# Altium PCB Power Center.PcbDoc
Units mil, origin at the board's own origin, x right, y up, seen from the top; angles counter-clockwise.
Board outline 1575 x 1575 mil, 4 copper layers (Top Layer, GND, POWER, Bottom Layer), stack 30.635 mil thick; 18 components, 4 nets, 46 pads, 6 vias.
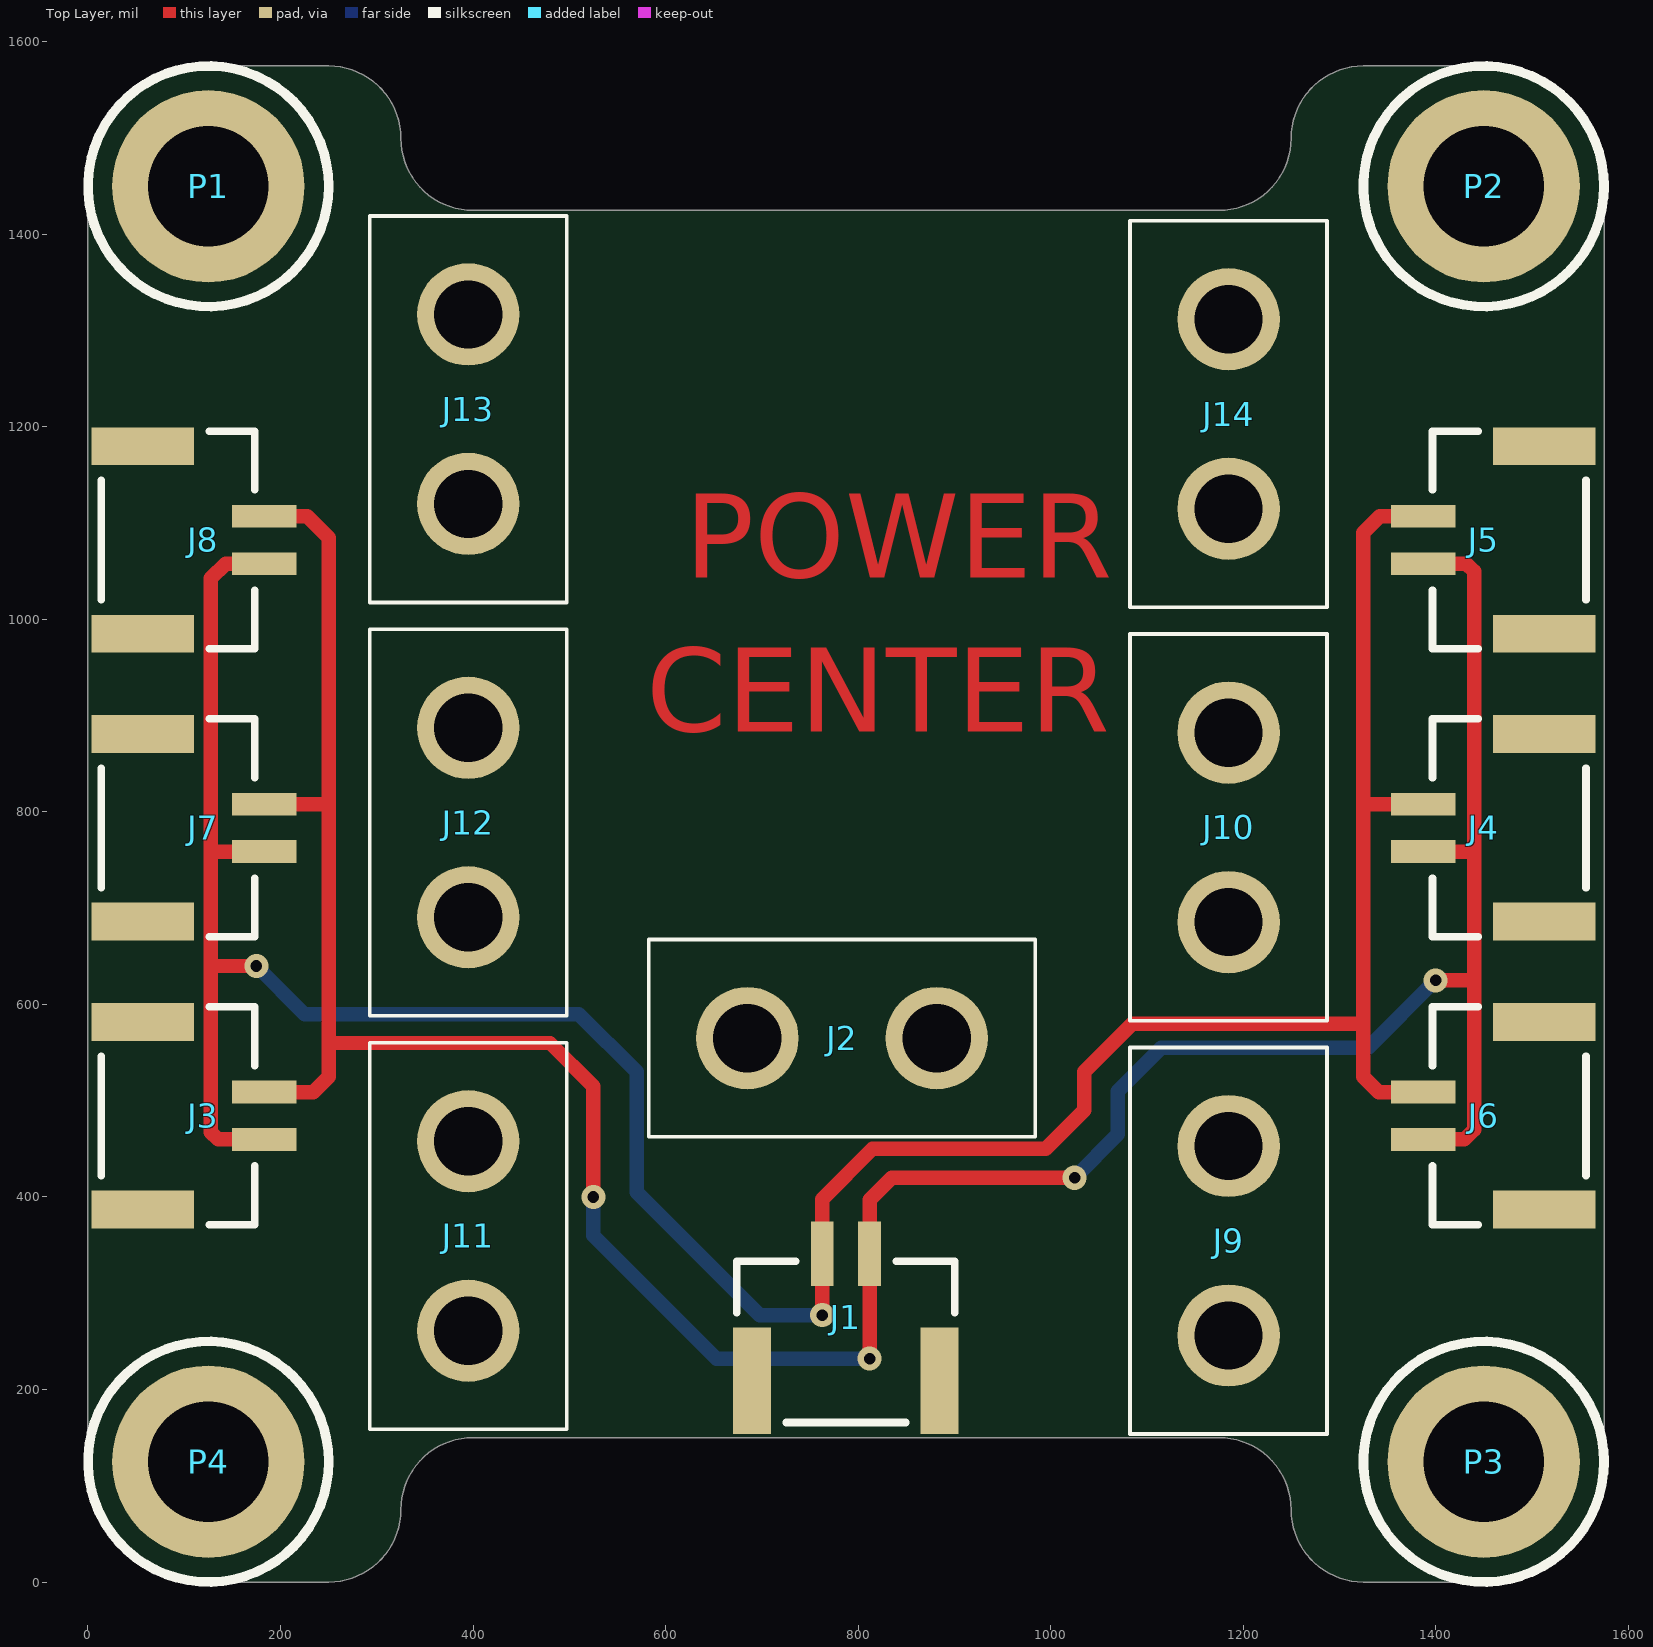
[diagram p0: Top Layer view]
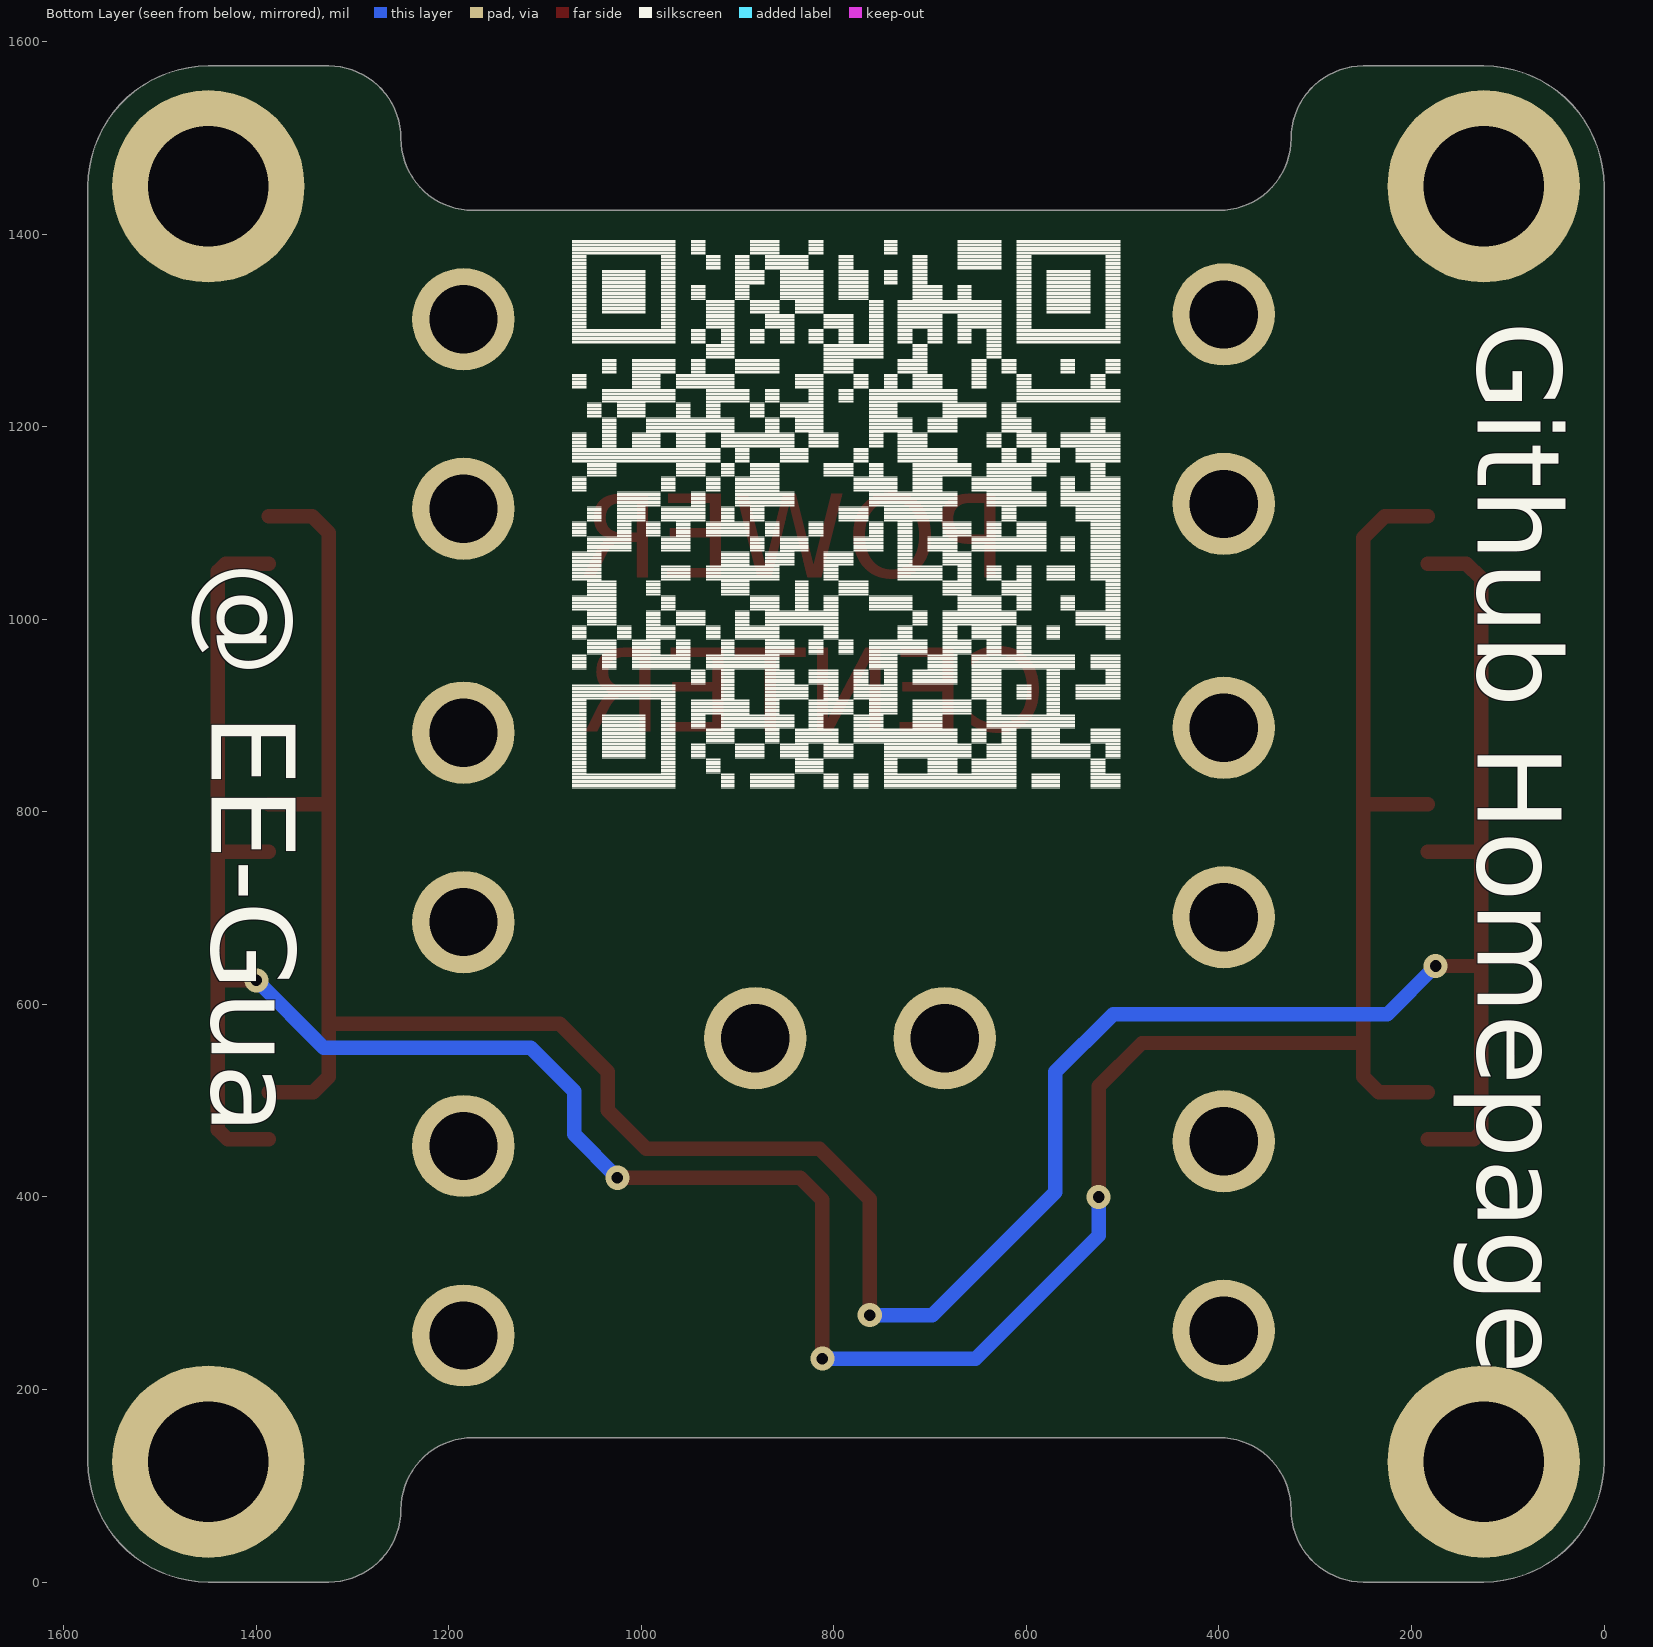
[diagram p1: Bottom Layer view, seen from below]
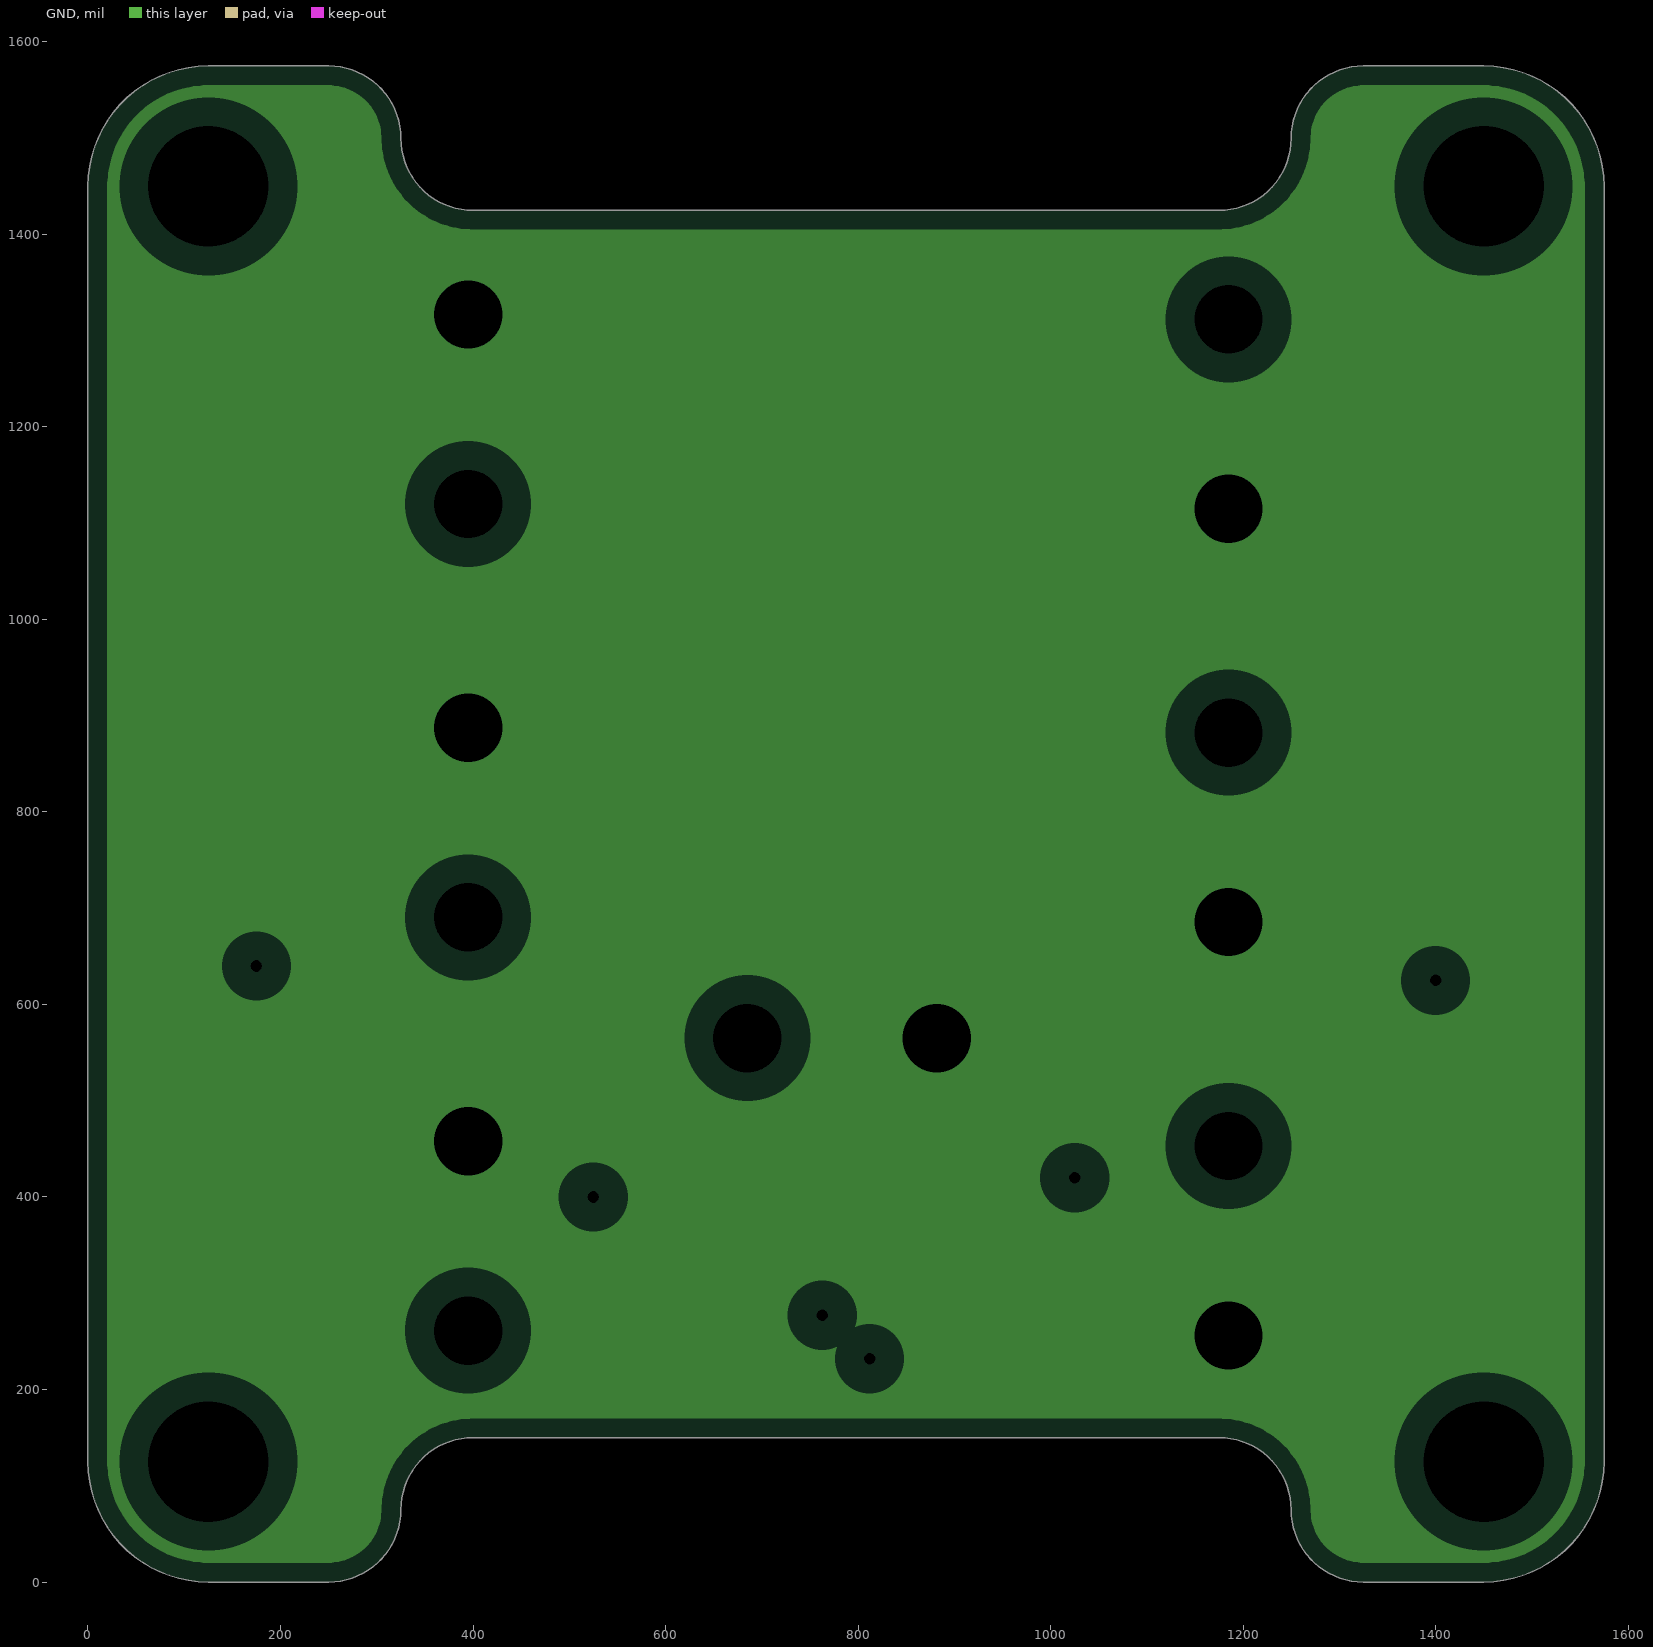
[diagram p2: GND, clearances drawn from the general rule]
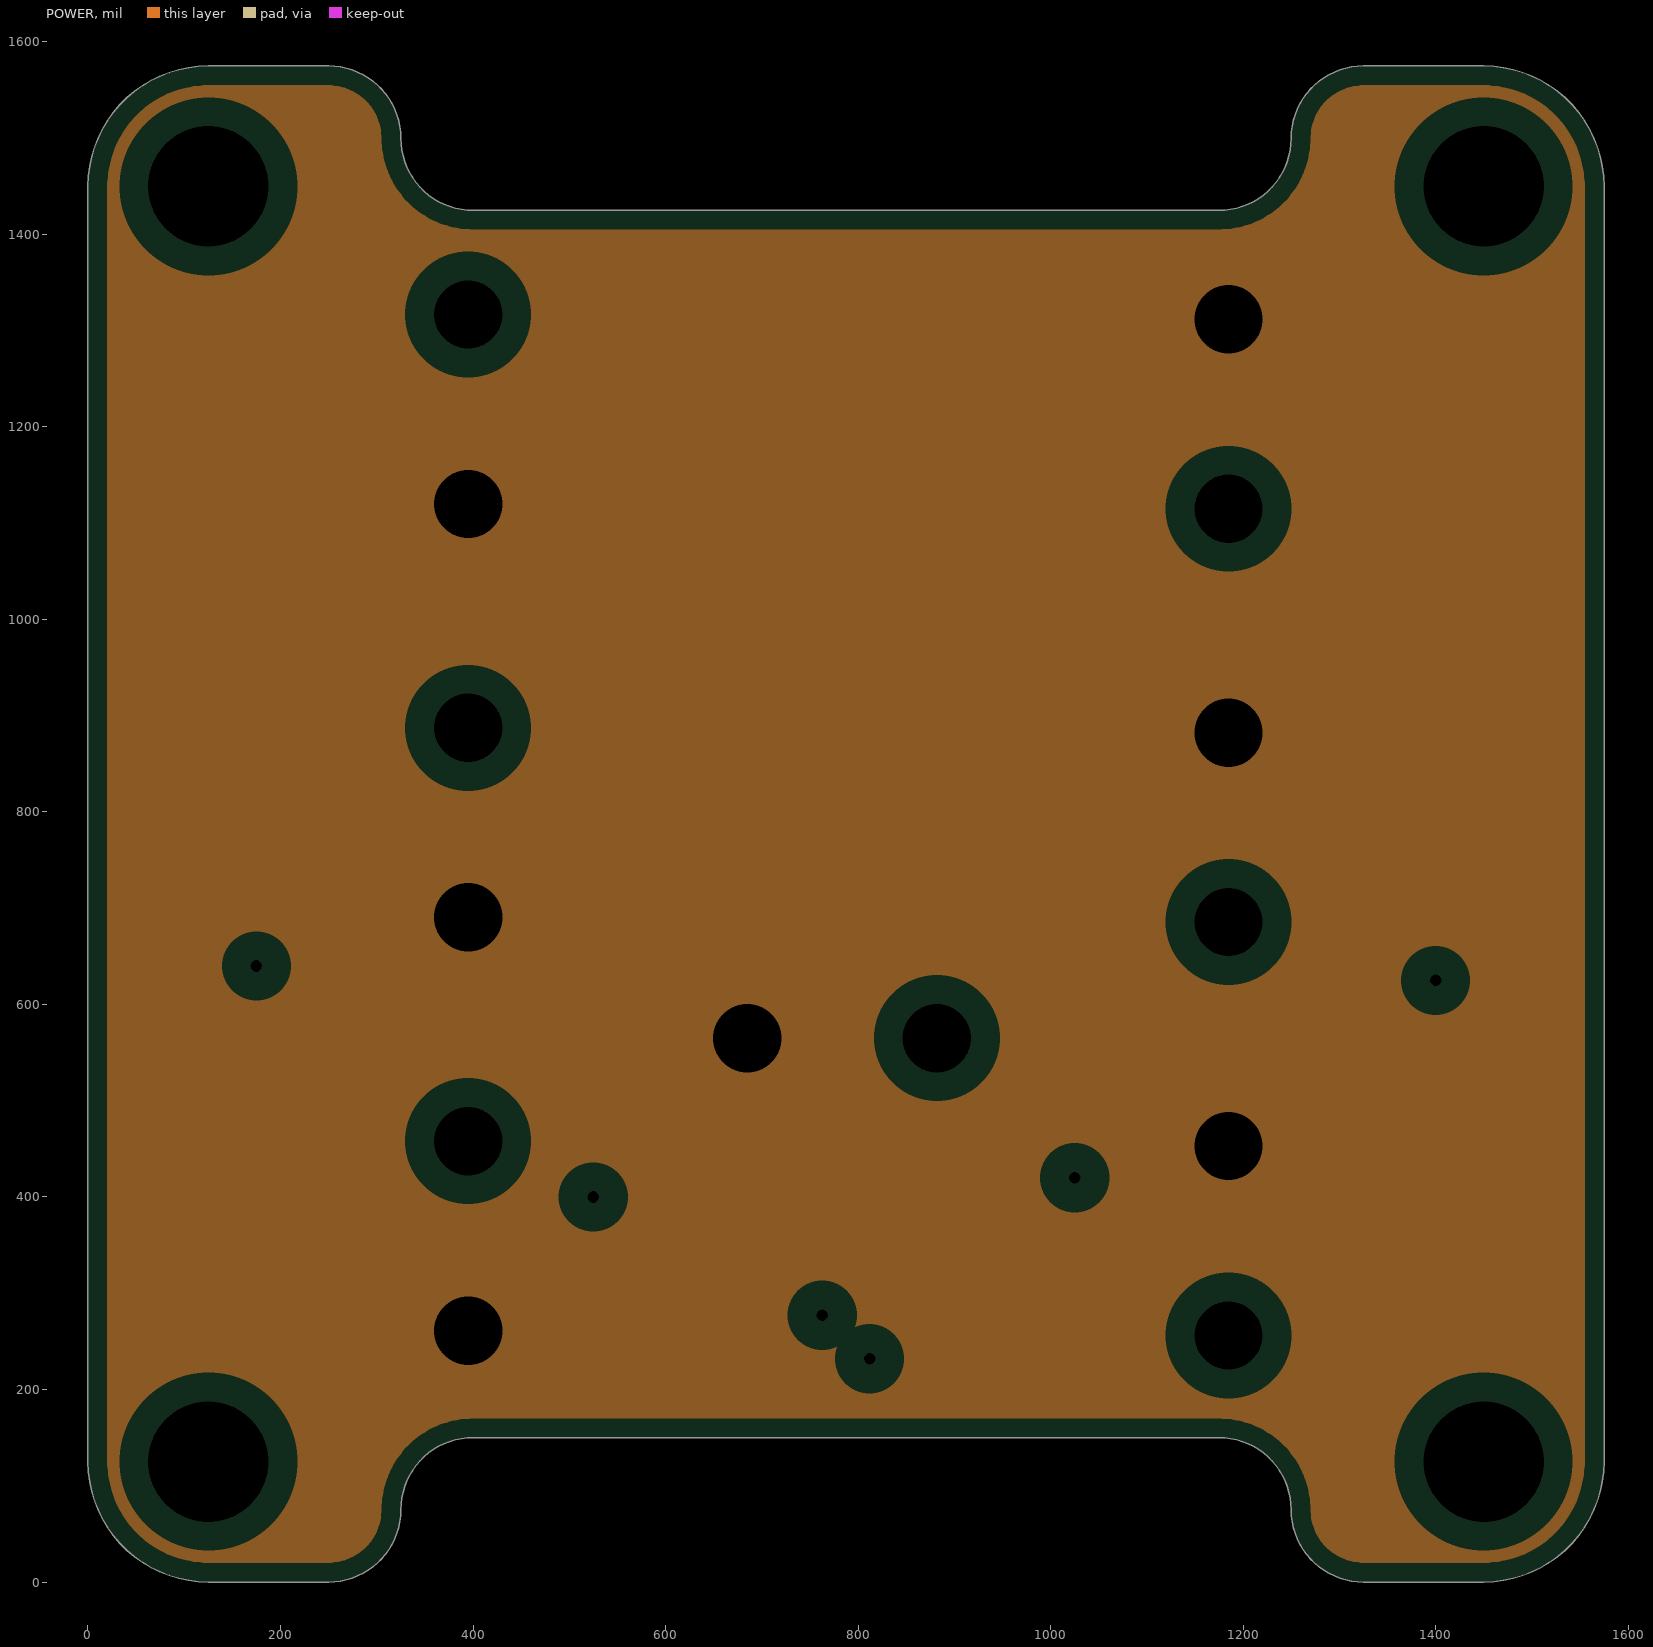
[diagram p3: POWER, clearances drawn from the general rule]
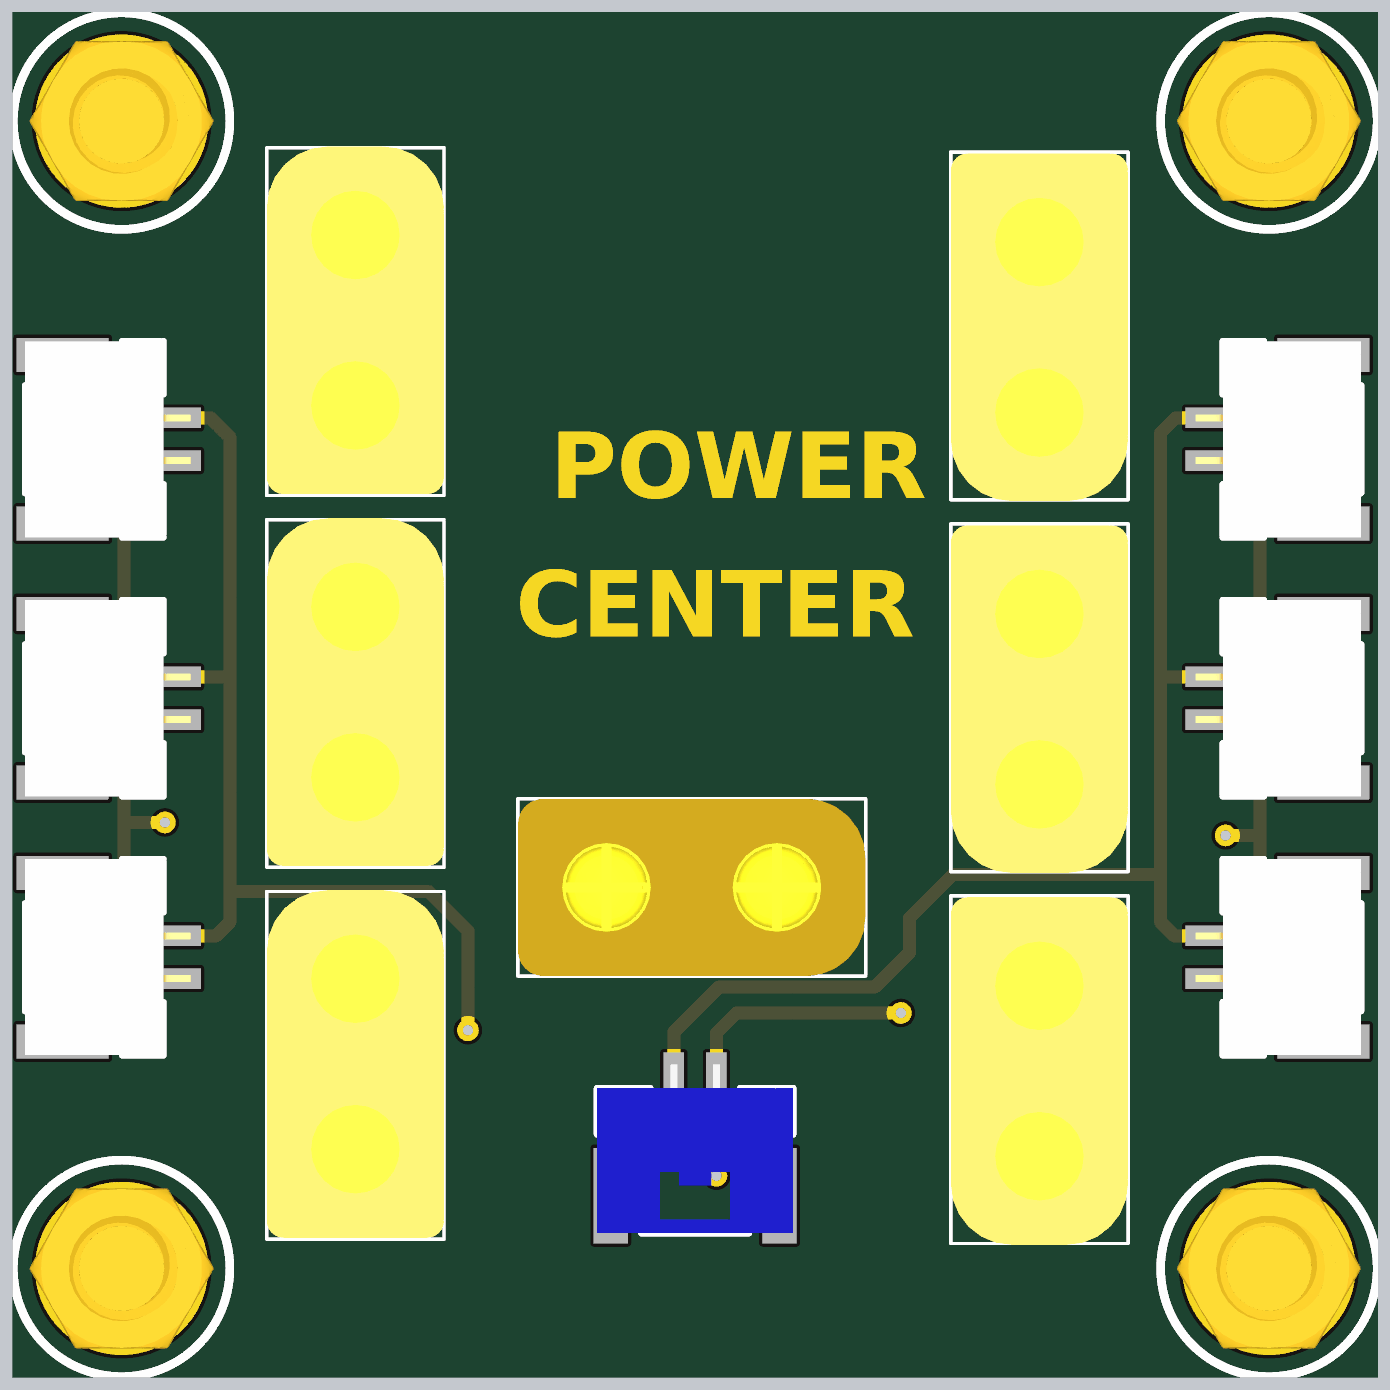
[diagram p4: 3D render of the assembled board from above, using the file's embedded part models]

## Layer stack, top to bottom
Top Solder: solder mask 0.4, Solder Resist, Dk 3.5
Top Layer: signal copper 1.4
Dielectric 1: core 10, FR-4, Dk 4.2
GND: plane copper 1.4173, net GND
Dielectric 3: prepreg 5, Dk 4.2
POWER: plane copper 1.4173, net VCC
Dielectric 2: core 10, Dk 4.2
Bottom Layer: signal copper 1.4
Bottom Solder: solder mask 0.4, Solder Resist, Dk 3.5

## Board outline
125,0 cw(c125,125) 0,125 0,1450 cw(c125,1450) 125,1575 250,1575 cw(c250,1500) 325,1500 ccw(c400,1500) 400,1425 1175,1425 ccw(c1175,1500) 1250,1500 cw(c1325,1500) 1325,1575 1450,1575 cw(c1450,1450) 1575,1450 1575,125 cw(c1450,125) 1450,0 1325,0 cw(c1325,75) 1250,75 ccw(c1175,75) 1175,150 400,150 ccw(c400,75) 325,75 cw(c250,75) 250,0

## Design rules (kind name [scope] priority, off if disabled: settings)
Clearance [All] p1: gap=10 ignorepadtopadclearanceinfootprint=FALSE
PlaneClearance [All] p1: clearance=30
PlaneConnect [All] p1: planeconnectstyle=Direct reliefexpansion=20 reliefentries=4 reliefconductorwidth=10 reliefairgap=10
PolygonConnect [All] p1: connectstyle=Direct reliefconductorwidth=10 reliefentries=4 polygonreliefangle="90 Angle" airgapwidth=10
RoutingVias [All] p1: holewidth=28 width=50 viastyle="Through Hole" minholewidth=28 minwidth=50 maxholewidth=28 maxwidth=50
SolderMaskExpansion [All] p1: expansion=4
UnRoutedNet [All] p1: checkbadconnections=TRUE
Width [All] p1: maxlimit=50 minlimit=10 preferedwidth=10 minimp=50.000000 maximp=50.000000 favimp=50.000000
27 further rules are at their usual default settings.

## Components (designator, comment, footprint, x,y, rotation, side; value= is the part's Value field where it differs from the comment)
J1 "GH1.25 Connector 2P立" GH1.25立2P 787.4,275 r180 top
J2 "XT30-M" XT30-M 685,565 r90 top
J3 "GH1.25 Connector 2P卧" GH1.25卧2P 120,484.37 r270 top
J4 "GH1.25 Connector 2P卧" GH1.25卧2P 1450,783.46 r90 top
J5 "GH1.25 Connector 2P卧" GH1.25卧2P 1450,1082.56 r90 top
J6 "GH1.25 Connector 2P卧" GH1.25卧2P 1450,484.37 r90 top
J7 "GH1.25 Connector 2P卧" GH1.25卧2P 120,783.46 r270 top
J8 "GH1.25 Connector 2P卧" GH1.25卧2P 120,1082.56 r270 top
J9 "XT30-F" XT30-F 1185,452.95 r0 top
J10 "XT30-F" XT30-F 1185,882.4 r0 top
J11 "XT30-F" XT30-F 395,261.1 r180 top
J12 "XT30-F" XT30-F 395,690.55 r180 top
J13 "XT30-F" XT30-F 395,1120 r180 top
J14 "XT30-F" XT30-F 1185,1311.85 r0 top
P1 "M3铜柱" M3x4+6铜柱 125,1450 r0 top
P2 "M3铜柱" M3x4+6铜柱 1450,1450 r0 top
P3 "M3铜柱" M3x4+6铜柱 1450,125 r0 top
P4 "M3铜柱" M3x4+6铜柱 125,125 r0 top

## Footprints (in the part's own frame and the unit in brackets; to place one, negate y for a bottom-side part, rotate by r counter-clockwise, add the part's x,y. Pads: shape width x height; smd on the part's side, far side on the other; paste and mask are expansions set on the pad)
GH1.25卧2P [mm] "SMD, 2-Leads, Body 5.75x4.05mm, Pitch 1.25mm"
  rect 0.6x1.7 smd: 1(-0.625,1.6) 2(0.625,1.6)
  rect 1x2.7 smd: MP1(-2.475,-1.6) MP2(2.475,-1.6)
  silkscreen extent -2.88,-2.7 2.88,1.35, body extent -2.87,-2.7 2.88,2.15, height 4.35
GH1.25立2P [mm] "Connector, 2-Leads, Body 5.75x4.25mm, Pitch 1.25mm"
  rect 0.6x1.7 smd: 1(-0.625,-1.675) 2(0.625,-1.675)
  rect 1x2.8 smd: MP1(-2.475,1.675) MP2(2.475,1.675)
  silkscreen extent -2.88,-1.47 2.88,2.78, body extent -2.88,-2.17 2.87,2.78, height 4.21
M3x4+6铜柱 [mil]
  round 200 hole 125: 1(0,0)
  silkscreen extent -125,-125 125,125, body extent -106,-93 106,93, height 159
XT30-F [mm]
  round 2.7 hole 1.8: 1(0,0) 2(0,-5)
  silkscreen extent -2.6,-7.6 2.6,2.6, body extent -2.6,-7.64 2.6,2.56, height 9.4
XT30-M [mm]
  round 2.7 hole 1.8: 1(0,0) 2(0,-5)
  silkscreen extent -2.6,-7.6 2.6,2.6, body extent -2.6,-7.6 2.6,2.6, height 10.66

## Part data
J1: "GH1.25 Connector", Manufacturer=JST, Package Description="GH Disconnectable Crimp Style Connector, Pitch 1.25 mm, 1 x 2 Position, Height 4.05 mm", Package Reference=BM02B-GHS-TBT, Datasheet URL=http://www.jst-mfg.com/product/pdf/eng/eGH.pdf, Datasheet Version=05/2016, Manufacturer URL=http://www.jst.com/home2.html, Mounting Technology=SurfaceMount, No of Positions=2, Pitch=1.25mm, Style/Orientation=StraightHeader/Plug, Termination=Crimp, Type=WiretoBoard
J2: "Connector", Manufacturer_Name=Amass, Manufacturer_Part_Number=XT30PB, Datasheet Link=https://www.tme.eu/Document/4acc913878197f8c2e30d4b8cdc47230/XT30UPB%20SPEC.pdf, Height=10.7mm
J3 J4 J5 J6 J7 J8: "GH1.25 Connector", Manufacturer=JST, Package Description="GH Disconnectable Crimp Style Connector, Pitch 1.25 mm, 1 x 2 Position, Height 4.25 mm", Package Reference=SM02B-GHS-TB, Datasheet URL=http://www.jst-mfg.com/product/pdf/eng/eGH.pdf, Datasheet Version=05/2016, Manufacturer URL=http://www.jst.com/home2.html, Mounting Technology=SurfaceMount, No of Positions=2, Pitch=1.25mm, Style/Orientation=RightAngleHeader/Plug, Termination=Crimp, Type=WiretoBoard
J9 J10 J11 J12 J13 J14: "Connector"
P1 P2 P3 P4: "Hole M3X4+6"

## Via types
v1: diameter 25, hole 12, Top Layer to Bottom Layer, 6 vias

## Nets (pads, with @x,y where several pads share a name; then routed paths per layer and width w, separated by ;. In a path a pad name is that pad's centre, name@x,y a point inside that pad or via, vN(x,y) a via of type N, cw(c..) or ccw(c..) an arc to the next point about the centre after c; other vN are vias at no path point)
CAN_H: J1.2 J3.2 J4.2 J5.2 J6.2 J7.2 J8.2 | length 3155.9
  Top Layer w15: v1(175,640) 127.66,640 ; J3.2 135.24,459.76 127.66,467.34 127.66,640 ; J7.2 127.66,758.86 ; J8.2 142.95,1057.95 127.66,1042.66 127.66,758.86 ; v1(762.8,277.2) J1.2 762.8,397.8 815,450 995,450 1035,490 1035,530 1085,580 1325,580 ; J6.2 1341.02,508.98 1325,525 1325,580 ; J4.2 1325,808.07 ; J5.2 1342.17,1107.17 1325,1090 1325,808.07 ; 127.66,640 127.66,758.86 ; 1325,580 1325,808.07
  Bottom Layer w15: v1(175,640) 225,590 510,590 570,530 570,405 697.8,277.2 v1(762.8,277.2)
CAN_L: J1.1 J3.1 J4.1 J5.1 J6.1 J7.1 J8.1 | length 3225.8
  Top Layer w15: J3.1 233.98,508.98 250,525 250,560 ; J7.1 250,808.07 ; J8.1 227.83,1107.17 250,1085 250,808.07 ; v1(525,400) 525,515 480,560 250,560 ; v1(812.01,232.01) J1.1 812.01,397.01 835,420 v1(1025,420) ; J6.1 1429.76,459.76 1440,470 1440,625 ; J4.1 1440,758.86 ; J5.1 1432.05,1057.95 1440,1050 1440,758.86 ; v1(1400,625) 1440,625 ; 250,560 250,808.07 ; 1440,625 1440,758.86
  Bottom Layer w15: v1(525,400) 525,360 652.99,232.01 v1(812.01,232.01) ; v1(1025,420) 1070,465 1070,510 1115,555 1330,555 v1(1400,625)
GND: J2.2 J9.2 J10.2 J11.2 J12.2 J13.2 J14.2
VCC: J2.1 J9.1 J10.1 J11.1 J12.1 J13.1 J14.1
pads on no net: J1.MP1 J1.MP2 J3.MP1 J3.MP2 J4.MP1 J4.MP2 J5.MP1 J5.MP2 J6.MP1 J6.MP2 J7.MP1 J7.MP2 J8.MP1 J8.MP2 P1.1 P2.1 P3.1 P4.1

## Polygon pours and split planes (outlines as drawn)
GND on GND (split plane): 233 vertices, not listed, extent 20.03,20.03 1554.97,1554.97
VCC on POWER (split plane): 233 vertices, not listed, extent 20.03,20.03 1554.97,1554.97

## Other copper
Top Layer:
  text "POWER" at 620,1015 h150
  text "CENTER" at 580,855 h150

## Silkscreen, mask and mechanical layers (free items; w line width, h text height)
Bottom Overlay:
  drawing of 4443 lines, arcs and shapes, not listed
  text "Github Homepage" at 160,1310 h150 r90
  text "@ EE-Gua" at 1475,1060 h150 r90
Top Solder:
  text "POWER" at 620,1015 h150
  text "CENTER" at 580,855 h150
Mechanical 1:
  the board outline again, w10